# Altium PCB MainPCB.PcbDoc
Units mm, origin at the board's own origin, x right, y up, seen from the top; angles counter-clockwise.
Board outline 116 x 94 mm, 2 copper layers (Top Layer, Bottom Layer); 36 components, 102 nets, 480 pads, 170 vias.
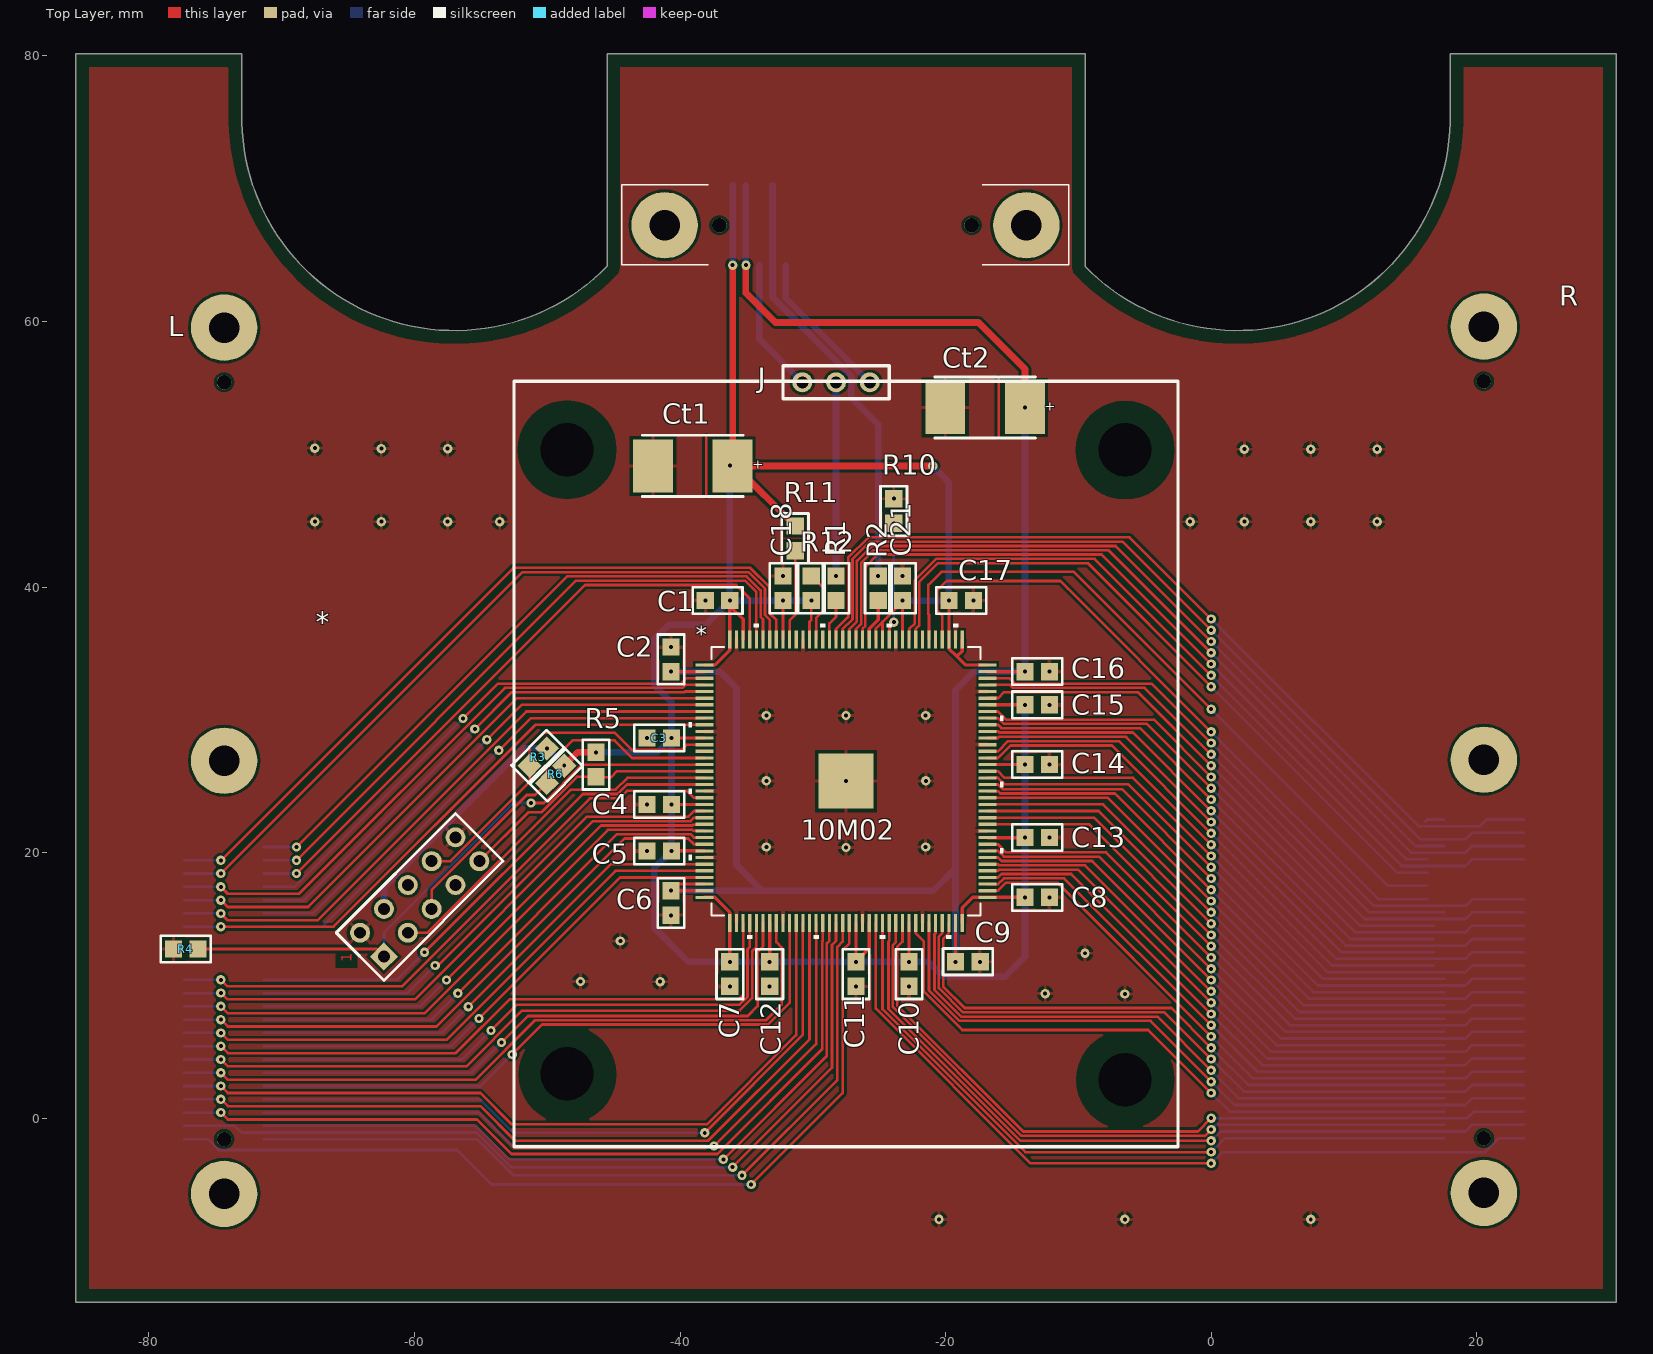
[diagram p0: Top Layer view]
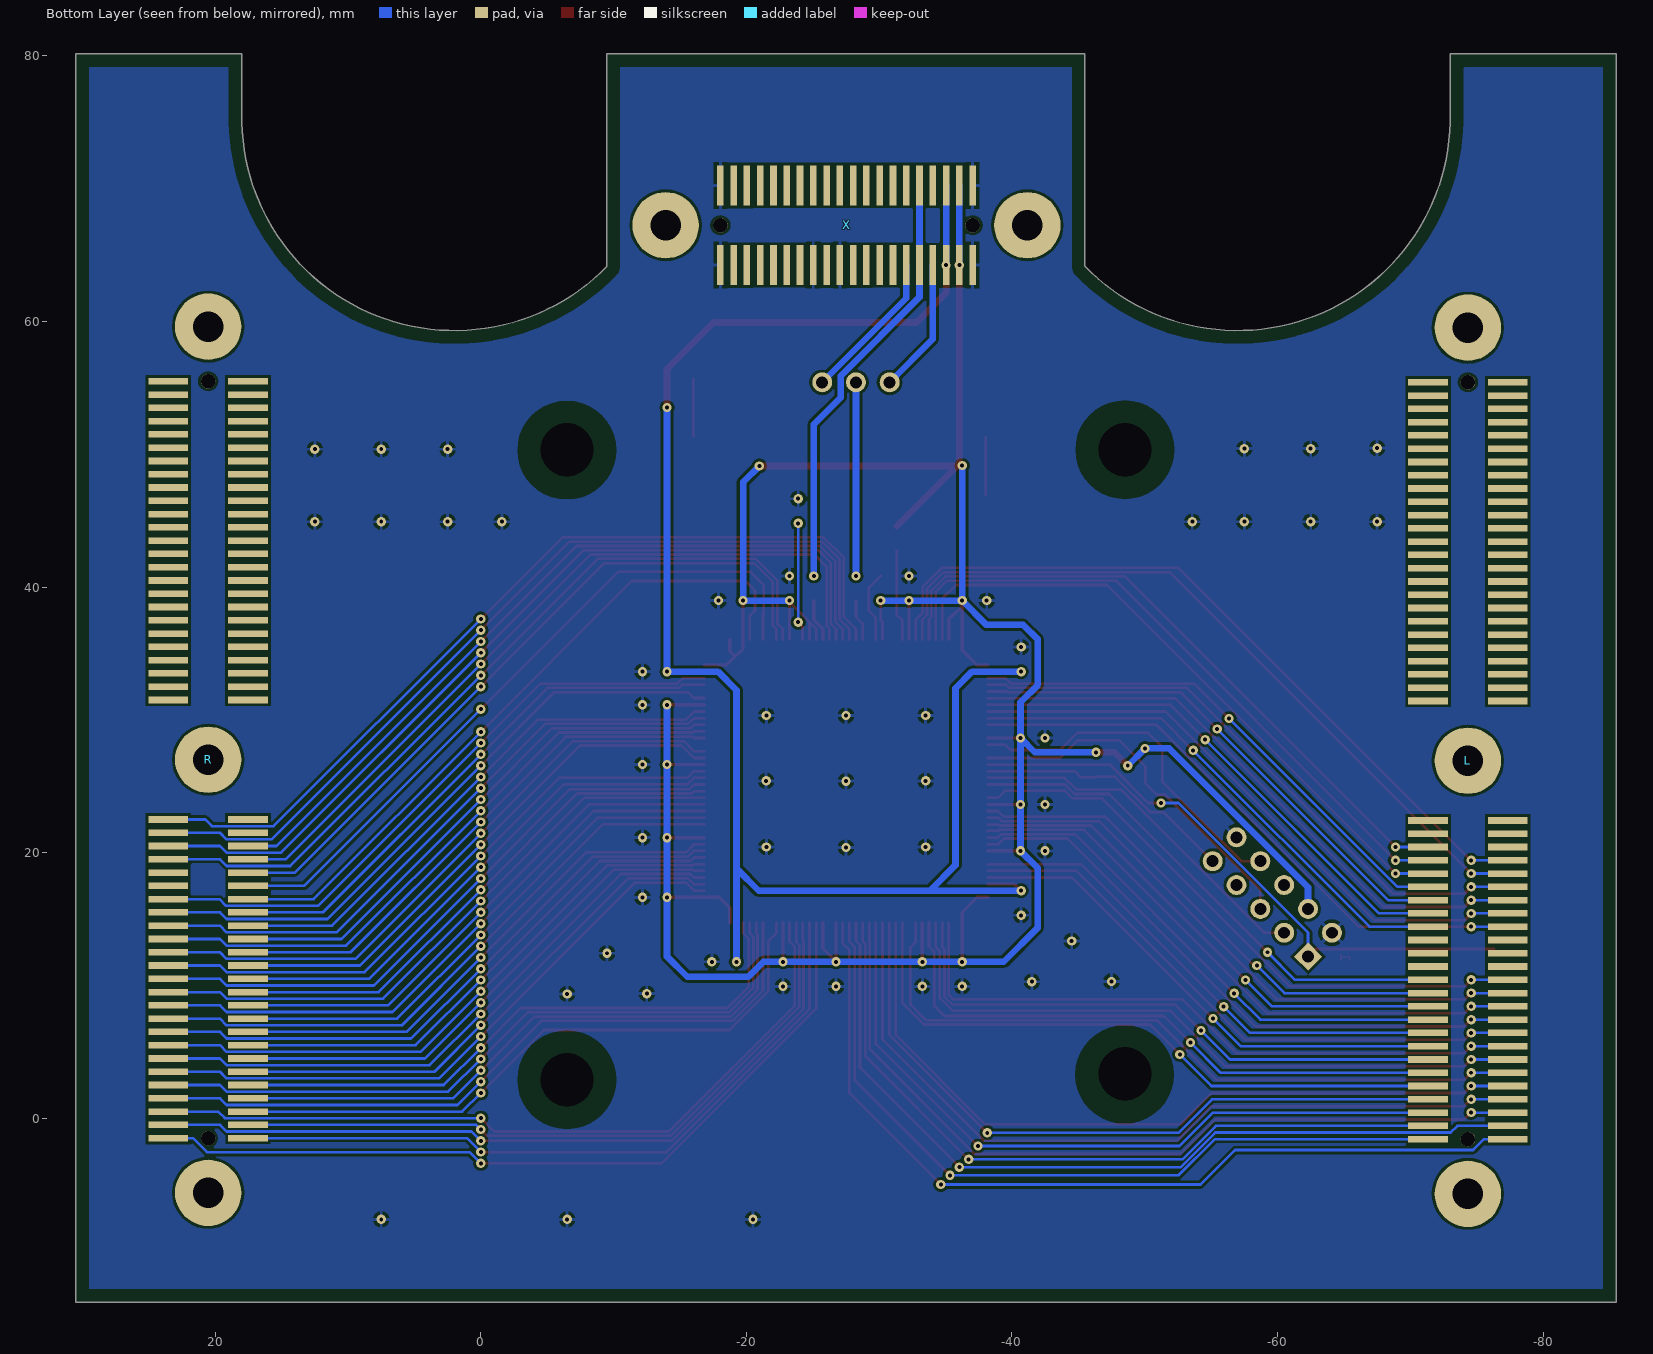
[diagram p1: Bottom Layer view, seen from below]

## Layer stack, top to bottom
Top Solder: solder mask 0.0102, Solder Resist, Dk 3.5
Top Layer: signal copper 0.0356
Dielectric 1: dielectric 0.32, FR-4, Dk 4.8
Bottom Layer: signal copper 0.0356
Bottom Solder: solder mask 0.0102, Solder Resist, Dk 3.5

## Board outline
-85.502,-13.843 -85.502,80.157 -73.003,80.157 -73,80.16 -73,75.009 ccw(c-56.975,75.347) -45.5,64.157 -45.5,80.157 -9.5,80.157 -9.5,64.157 ccw(c1.975,75.347) 18,75.009 18,80.16 18.003,80.157 30.5,80.157 30.5,-13.843

## Design rules (kind name [scope] priority, off if disabled: settings)
BoardOutlineClearance [All] p1: gap=1 ignorepadtopadclearanceinfootprint=FALSE
Clearance [All] p1: gap=0.15 ignorepadtopadclearanceinfootprint=FALSE except(0: Arc-Hole Track-Hole SMDPad-Hole THPad-Hole Via-Hole Fill-Hole Poly-Hole Region-Hole Text-Hole; 0.125: Track-Track; 0.2: Arc-Poly Track-Poly SMDPad-Poly THPad-Poly Via-Poly Fill-Poly Poly-Poly)
ComponentClearance [All] p1: gap=0.15 collisioncheckmode=3 verticalgap=-1 showdistances=FALSE
HoleSize [All] p1: absolutevalues=TRUE maxlimit=7 minlimit=0.025 maxpercent=80.000 minpercent=20.000
HoleToHoleClearance [All] p1: gap=0.2 allowstackedmicrovias=TRUE
MinimumAnnularRing [All] p1: minimumring=0.15
MinimumSolderMaskSliver [All] p1: minsoldermaskwidth=0.15
PolygonConnect [All] p1: connectstyle=Relief reliefconductorwidth=0.254 reliefentries=4 polygonreliefangle="90 Angle" airgapwidth=0.254
RoutingVias [All] p1: holewidth=0.3 width=0.7 viastyle="Through Hole" minholewidth=0.3 minwidth=0.7 maxholewidth=7 maxwidth=7
SilkToSilkClearance [All] p1 off: silktosilkclearance=0.254
SilkToSolderMaskClearance [IsPad] p1 off: minsilkscreentomaskgap=0.15 clearancetoexposedcopper=TRUE
SolderMaskExpansion [All] p1: expansion=0.05
Width [All] p1: maxlimit=2 minlimit=0.15 preferedwidth=0.254
24 further rules are at their usual default settings.

## Components (designator, comment, footprint, x,y, rotation, side; value= is the part's Value field where it differs from the comment)
10M02 "Part Number: 10M02SCE144C8G" EQFP-144_A:1P65_ -27.5,25.384 r0 top locked value=Value
* "JTAG" JTAG -59.528,16.709 r45 top locked
C1 "*" 0805 -37.175,38.984 r180 top
C2 "*" 0805 -40.689,34.559 r90 top
C3 "*" 0805 -41.564,28.634 r180 top
C4 "*" 0805 -41.564,23.634 r180 top
C5 "*" 0805 -41.564,20.134 r180 top
C6 "*" 0805 -40.689,16.209 r90 top
C7 "*" 0805 -36.25,10.859 r90 top
C8 "*" 0805 -13.1,16.634 r0 top
C9 "*" 0805 -18.325,11.784 r0 top
C10 "*" 0805 -22.75,10.859 r270 top
C11 "*" 0805 -26.75,10.859 r270 top
C12 "*" 0805 -33.25,10.859 r270 top
C13 "*" 0805 -13.1,21.134 r180 top
C14 "*" 0805 -13.1,26.634 r180 top
C15 "*" 0805 -13.1,31.134 r0 top
C16 "*" 0805 -13.1,33.634 r0 top
C17 "*" 0805 -18.825,38.984 r0 top
C18 "*" 0805 -32.25,39.909 r90 top
C21 "*" 0805 -23.25,39.909 r90 top
Ct1 "C_Ta" C_Ta -39.039,49.125 r180 top
Ct2 "C_Ta" C_Ta -17.025,53.525 r180 top
J "JUMPER_SWITCH_2S" JUMPER_SWITCH_2S -28.25,55.424 r0 top locked
L "FSI-150-L" FSI-150 -74.276,26.945 r0 top locked
R "FSI-150-R" FSI-150 20.599,27.02 r0 top locked
R1 "*" 0805 -28.25,39.909 r90 top
R2 "*" 0805 -25.075,39.909 r90 top
R3 "10K" 0805 -50.674,27.197 r45 top
R4 "1K" 0805 -77.228,12.743 r0 top
R5 "10K" 0805 -46.328,26.634 r90 top
R6 "10K" 0805 -49.374,25.897 r45 top
R10 "10K" 0805 -23.902,45.73 r270 top
R11 "10K" 0805 -31.328,43.668 r90 top
R12 "10K" 0805 -30.11,39.909 r270 top
X "FSI120" FSI-120 -26.872,67.436 r0 top locked

## Footprints (in the part's own frame and the unit in brackets; to place one, negate y for a bottom-side part, rotate by r counter-clockwise, add the part's x,y. Pads: shape width x height; smd on the part's side, far side on the other; paste and mask are expansions set on the pad)
0805 [mm]
  rect 1.3x1.3 smd: 1(-0.925,0) 2(0.925,0)
  silkscreen extent -1.88,-1 1.88,1, body extent -1,-0.63 1,0.63, height 0.4
C_Ta [mm]
  rect 3x4 smd: 1(-3,0) 2(3,0)
  Top Layer lines w0.2: -1.016,2.159 -1.016,-2.159
  silkscreen extent -3.8,-2.3 3.8,2.3, body extent -3.8,-2.3 3.8,2.3, height 4.3
EQFP-144_A:1P65_ [mm]
  rect 1.353x0.239 smd paste+0 mask+0: 1(-10.672,8.75) 2(-10.672,8.25) 3(-10.672,7.75) 4(-10.672,7.25) 5(-10.672,6.75) 6(-10.672,6.25) 7(-10.672,5.75) 8(-10.672,5.25) 9(-10.672,4.75) 10(-10.672,4.25) 11(-10.672,3.75) 12(-10.672,3.25) 13(-10.672,2.75) 14(-10.672,2.25) 15(-10.672,1.75) 16(-10.672,1.25) 17(-10.672,0.75) 18(-10.672,0.25) 19(-10.672,-0.25) 20(-10.672,-0.75) 21(-10.672,-1.25) 22(-10.672,-1.75) 23(-10.672,-2.25) 24(-10.672,-2.75) 25(-10.672,-3.25) 26(-10.672,-3.75) 27(-10.672,-4.25) 28(-10.672,-4.75) 29(-10.672,-5.25) 30(-10.672,-5.75) 31(-10.672,-6.25) 32(-10.672,-6.75) 33(-10.672,-7.25) 34(-10.672,-7.75) 35(-10.672,-8.25) 36(-10.672,-8.75) 73(10.672,-8.75) 74(10.672,-8.25) 75(10.672,-7.75) 76(10.672,-7.25) 77(10.672,-6.75) 78(10.672,-6.25) 79(10.672,-5.75) 80(10.672,-5.25) 81(10.672,-4.75) 82(10.672,-4.25) 83(10.672,-3.75) 84(10.672,-3.25) 85(10.672,-2.75) 86(10.672,-2.25) 87(10.672,-1.75) 88(10.672,-1.25) 89(10.672,-0.75) 90(10.672,-0.25) 91(10.672,0.25) 92(10.672,0.75) 93(10.672,1.25) 94(10.672,1.75) 95(10.672,2.25) 96(10.672,2.75) 97(10.672,3.25) 98(10.672,3.75) 99(10.672,4.25) 100(10.672,4.75) 101(10.672,5.25) 102(10.672,5.75) 103(10.672,6.25) 104(10.672,6.75) 105(10.672,7.25) 106(10.672,7.75) 107(10.672,8.25) 108(10.672,8.75)
  rect 0.239x1.353 smd paste+0 mask+0: 37(-8.75,-10.672) 38(-8.25,-10.672) 39(-7.75,-10.672) 40(-7.25,-10.672) 41(-6.75,-10.672) 42(-6.25,-10.672) 43(-5.75,-10.672) 44(-5.25,-10.672) 45(-4.75,-10.672) 46(-4.25,-10.672) 47(-3.75,-10.672) 48(-3.25,-10.672) 49(-2.75,-10.672) 50(-2.25,-10.672) 51(-1.75,-10.672) 52(-1.25,-10.672) 53(-0.75,-10.672) 54(-0.25,-10.672) 55(0.25,-10.672) 56(0.75,-10.672) 57(1.25,-10.672) 58(1.75,-10.672) 59(2.25,-10.672) 60(2.75,-10.672) 61(3.25,-10.672) 62(3.75,-10.672) 63(4.25,-10.672) 64(4.75,-10.672) 65(5.25,-10.672) 66(5.75,-10.672) 67(6.25,-10.672) 68(6.75,-10.672) 69(7.25,-10.672) 70(7.75,-10.672) 71(8.25,-10.672) 72(8.75,-10.672) 109(8.75,10.672) 110(8.25,10.672) 111(7.75,10.672) 112(7.25,10.672) 113(6.75,10.672) 114(6.25,10.672) 115(5.75,10.672) 116(5.25,10.672) 117(4.75,10.672) 118(4.25,10.672) 119(3.75,10.672) 120(3.25,10.672) 121(2.75,10.672) 122(2.25,10.672) 123(1.75,10.672) 124(1.25,10.672) 125(0.75,10.672) 126(0.25,10.672) 127(-0.25,10.672) 128(-0.75,10.672) 129(-1.25,10.672) 130(-1.75,10.672) 131(-2.25,10.672) 132(-2.75,10.672) 133(-3.25,10.672) 134(-3.75,10.672) 135(-4.25,10.672) 136(-4.75,10.672) 137(-5.25,10.672) 138(-5.75,10.672) 139(-6.25,10.672) 140(-6.75,10.672) 141(-7.25,10.672) 142(-7.75,10.672) 143(-8.25,10.672) 144(-8.75,10.672)
  rect 4.14x4.14 smd paste-2.057 mask+0: EPAD(0,0)
  silkscreen extent -11.86,-11.86 11.86,11.86, body extent 0,0 0.25,0.25, height 0.25
FSI-120 [mm]
  rect 0.5x3 smd far side: 1(8.833,-3.186) 2(7.833,-3.186) 3(6.833,-3.186) 4(5.833,-3.186) 5(4.833,-3.186) 6(3.833,-3.186) 7(2.833,-3.186) 8(1.833,-3.186) 9(0.833,-3.186) 10(-0.167,-3.186) 11(-1.167,-3.186) 12(-2.167,-3.186) 13(-3.167,-3.186) 14(-4.167,-3.186) 15(-5.167,-3.186) 16(-6.167,-3.186) 17(-7.167,-3.186) 18(-8.167,-3.186) 19(-9.167,-3.186) 20(-10.167,-3.186) 21(-10.167,2.814) 22(-9.167,2.814) 23(-8.167,2.814) 24(-7.167,2.814) 25(-6.167,2.814) 26(-5.167,2.814) 27(-4.167,2.814) 28(-3.167,2.814) 29(-2.167,2.814) 30(-1.167,2.814) 31(-0.167,2.814) 32(0.833,2.814) 33(1.833,2.814) 34(2.833,2.814) 35(3.833,2.814) 36(4.833,2.814) 37(5.833,2.814) 38(6.833,2.814) 39(7.833,2.814) 40(8.833,2.814)
  round 1.1 hole 1.1 unplated: H1(-10.167,-0.186) H2(8.833,-0.186)
  round 5 hole 2.3: UL_HOLE(12.953,-0.186) UR_HOLE(-14.287,-0.186)
  body extent -17.72,-5.19 16.38,4.81, height 8.25
FSI-150 [mm]
  round 1.1 hole 1.1 unplated: 1(-0.063,-28.521) 1(-0.063,28.479)
  rect 3x0.5 smd far side: R_1(-3.063,-28.52) R_2(2.937,-28.52) R_3(-3.063,-27.52) R_4(2.937,-27.52) R_5(-3.063,-26.52) R_6(2.937,-26.52) R_7(-3.063,-25.52) R_8(2.937,-25.52) R_9(-3.063,-24.52) R_10(2.937,-24.52) R_11(-3.063,-23.52) R_12(2.937,-23.52) R_13(-3.063,-22.52) R_14(2.937,-22.52) R_15(-3.063,-21.52) R_16(2.937,-21.52) R_17(-3.063,-20.52) R_18(2.937,-20.52) R_19(-3.063,-19.52) R_20(2.937,-19.52) R_21(-3.063,-18.52) R_22(2.937,-18.52) R_23(-3.063,-17.52) R_24(2.937,-17.52) R_25(-3.063,-16.52) R_26(2.937,-16.52) R_27(-3.063,-15.52) R_28(2.937,-15.52) R_29(-3.063,-14.52) R_30(2.937,-14.52) R_31(-3.063,-13.52) R_32(2.937,-13.52) R_33(-3.063,-12.52) R_34(2.937,-12.52) R_35(-3.063,-11.52) R_36(2.937,-11.52) R_37(-3.063,-10.52) R_38(2.937,-10.52) R_39(-3.063,-9.52) R_40(2.937,-9.52) R_41(-3.063,-8.52) R_42(2.937,-8.52) R_43(-3.063,-7.52) R_44(2.937,-7.52) R_45(-3.063,-6.52) R_46(2.937,-6.52) R_47(-3.063,-5.52) R_48(2.937,-5.52) R_49(-3.063,-4.52) R_50(2.937,-4.52) R_51(-3.063,4.479) R_52(2.937,4.479) R_53(-3.063,5.479) R_54(2.937,5.479) R_55(-3.063,6.479) R_56(2.937,6.479) R_57(-3.063,7.479) R_58(2.937,7.479) R_59(-3.063,8.479) R_60(2.937,8.479) R_61(-3.063,9.479) R_62(2.937,9.479) R_63(-3.063,10.479) R_64(2.937,10.479) R_65(-3.063,11.479) R_66(2.937,11.479) R_67(-3.063,12.479) R_68(2.937,12.479) R_69(-3.063,13.479) R_70(2.937,13.479) R_71(-3.063,14.479) R_72(2.937,14.479) R_73(-3.063,15.479) R_74(2.937,15.479) R_75(-3.063,16.479) R_76(2.937,16.479) R_77(-3.063,17.479) R_78(2.937,17.479) R_79(-3.063,18.479) R_80(2.937,18.479) R_81(-3.063,19.479) R_82(2.937,19.479) R_83(-3.063,20.479) R_84(2.937,20.479) R_85(-3.063,21.479) R_86(2.937,21.479) R_87(-3.063,22.479) R_88(2.937,22.479) R_89(-3.063,23.479) R_90(2.937,23.479) R_91(-3.063,24.479) R_92(2.937,24.479) R_93(-3.063,25.479) R_94(2.937,25.479) R_95(-3.063,26.479) R_96(2.937,26.479) R_97(-3.063,27.479) R_98(2.937,27.479) R_99(-3.063,28.479) R_100(2.937,28.479)
  round 5 hole 2.3: RB_HOLE(-0.063,-32.641) RM_HOLE(-0.063,-0.021) RU_HOLE(-0.063,32.599)
  body extent -5.14,-36.05 4.86,36.05, height 8.25
JTAG [mm]
  rect 1.5x1.5 hole 0.9: 1(-5.166,-1.248)
  round 1.5 hole 0.9: 2(-5.166,1.292) 3(-2.626,-1.248) 4(-2.626,1.292) 5(-0.086,-1.248) 6(-0.086,1.292) 7(2.454,-1.248) 8(2.454,1.292) 9(4.994,-1.248) 10(4.994,1.292)
  silkscreen extent -6.44,-2.52 6.26,2.56, body extent -10.3,-4.4 10.3,4.4, height 9.1
JUMPER_SWITCH_2S [mm] "2 state jumper switch"
  round 1.5 hole 0.9: 0(0,0) 1(-2.54,0) 2(2.54,0)
  silkscreen extent -4,-1.25 4,1.25

## Part data
10M02: library part 10M02SCE144C8G, "No Description Available", Built_By=EMA_Cory, Copyright="Copyright (C) 2018 Accelerated Designs. All rights reserved", Manufacturer_Part_Number=10M02SCE144C8G, RefDes=RefDes, Type=DEV, Vendor=Intel
C1 C2 C3 C4 C5 C6 C7 C8 C9 C10 C11 C12 C13 C14 C15 C16 C17 C18 C21: library part C0805, "0805 ceramic capacitor"
Ct1 Ct2: "tantalum capacitor"
J: "2 state jumper switch"
L: "fsi 150 left"
R: "fsi 150 right"
R1 R2 R3 R4 R5 R6 R10 R11 R12: library part R0805, "0805 resistor"

## Free pads (board coordinates)
  round 7 on Keep-Out: 10(-48.477,3.289) 11(-48.502,50.346) 12(-6.477,50.314) 13(-6.477,2.896)
  round 0 hole 4 unplated: Hole(-48.502,3.346) Hole(-48.502,50.346) Hole(-6.502,2.896) Hole(-6.502,50.346)

## Via types
v1: diameter 0.7, hole 0.3, Top Layer to Bottom Layer, tented both sides, 134 vias
v2: diameter 0.7, hole 0.3, Top Layer to Bottom Layer, 36 vias

## Nets (pads, with @x,y where several pads share a name; then routed paths per layer and width w, separated by ;. In a path a pad name is that pad's centre, name@x,y a point inside that pad or via, vN(x,y) a via of type N, cw(c..) or ccw(c..) an arc to the next point about the centre after c; other vN are vias at no path point)
3: 10M02.3 L.R_40 | length 39.7
  Top Layer w0.2: v1(-56.35,30.107) -53.723,32.734 -39.935,32.734 -39.535,33.134 10M02.3
  Bottom Layer w0.2: L.R_40 -69.032,17.425 v1(-56.35,30.107)
4: 10M02.4 L.R_39 | length 45.9
  Top Layer w0.2: v2(-74.58,17.425) -74.062,16.907 -68.701,16.907 -53.199,32.409 -39.801,32.409 -39.576,32.634 10M02.4
  Bottom Layer w0.2: L.R_39 v2(-74.58,17.425)
5: 10M02.5 L.R_38 | length 39.6
  Top Layer w0.2: v1(-55.45,29.307) -52.673,32.084 -39.666,32.084 -39.616,32.134 10M02.5
  Bottom Layer w0.2: L.R_38 -68.332,16.425 -55.55,29.207 v1@-55.45,29.207
6: 10M02.6 L.R_37 | length 45.9
  Top Layer w0.2: v2(-74.58,16.425) -74.062,15.907 -68.001,15.907 -52.274,31.634 10M02.6
  Bottom Layer w0.2: L.R_37 v2(-74.58,16.425)
7: 10M02.7 L.R_36 | length 39.7
  Top Layer w0.2: v1(-54.55,28.507) -51.923,31.134 10M02.7
  Bottom Layer w0.2: L.R_36 -67.632,15.425 v1(-54.55,28.507)
8: 10M02.8 L.R_35 | length 45.9
  Top Layer w0.2: v2(-74.58,15.425) -74.062,14.907 -67.301,14.907 -51.574,30.634 10M02.8
  Bottom Layer w0.2: L.R_35 v2(-74.58,15.425)
9: 10M02.9 L.R_34 | length 39.7
  Top Layer w0.2: v1(-53.65,27.707) -51.223,30.134 10M02.9
  Bottom Layer w0.2: L.R_34 -66.932,14.425 v1(-53.65,27.707)
10: 10M02.10 L.R_33 | length 45.5
  Top Layer w0.2: v2(-74.58,14.425) -66.083,14.425 -50.874,29.634 10M02.10
  Bottom Layer w0.2: L.R_33 v2(-74.58,14.425)
19: 10M02.19 L.R_26 | length 39.3
  Top Layer w0.2: v2(-59.239,12.5) -47.321,24.418 -44.71,24.418 -43.994,25.134 10M02.19
  Bottom Layer w0.2: L.R_26 -61.314,10.425 v2(-59.239,12.5)
21: 10M02.21 L.R_25 | length 45.7
  Top Layer w0.2: v2(-74.58,10.425) -74.089,9.934 -60.957,9.934 -46.798,24.093 -44.551,24.093 -43.988,24.655 -39.47,24.655 -38.948,24.134 10M02.21
  Bottom Layer w0.2: L.R_25 v2(-74.58,10.425)
23: 10M02.23 L.R_24 | length 38.8
  Top Layer w0.2: v2(-58.439,11.505) -58.219,11.505 -47.027,22.696 -39.386,22.696 -38.948,23.134 10M02.23
  Bottom Layer w0.2: L.R_24 -60.519,9.425 v2(-58.439,11.505)
24: 10M02.24 L.R_23 | length 45
  Top Layer w0.2: v2(-74.58,9.425) -74.565,9.425 -74.113,8.973 -59.939,8.973 -46.541,22.371 -39.211,22.371 -38.948,22.634 10M02.24
  Bottom Layer w0.2: L.R_23 v2(-74.58,9.425)
25: 10M02.25 L.R_22 | length 38.8
  Top Layer w0.2: v2(-57.59,10.405) -45.949,22.046 -43.88,22.046 -39.076,22.046 -39.008,22.114 -38.191,22.114 10M02.25
  Bottom Layer w0.2: L.R_22 -59.57,8.425 v2(-57.59,10.405)
26: 10M02.26 L.R_21 | length 45.1
  Top Layer w0.2: v2(-74.58,8.425) -74.06,7.905 -59.242,7.905 -45.425,21.721 -42.122,21.721 -39.076,21.721 -39.008,21.653 -38.191,21.653 10M02.26
  Bottom Layer w0.2: L.R_21 v2(-74.58,8.425)
27: 10M02.27 L.R_20 | length 39.1
  Top Layer w0.2: v2(-56.739,9.405) -44.748,21.396 -40.639,21.396 -39.211,21.396 -38.948,21.134 10M02.27
  Bottom Layer w0.2: L.R_20 -58.719,7.425 v2(-56.739,9.405)
28: 10M02.28 L.R_19 | length 45.4
  Top Layer w0.2: v2(-74.58,7.425) -74.06,6.905 -58.344,6.905 -44.177,21.071 -39.386,21.071 -38.948,20.634 10M02.28
  Bottom Layer w0.2: L.R_19 v2(-74.58,7.425)
31: 10M02.31 L.R_18 | length 38.4
  Top Layer w0.2: v2(-55.939,8.405) -45.21,19.134 10M02.31
  Bottom Layer w0.2: L.R_18 -57.919,6.425 v2(-55.939,8.405)
32: 10M02.32 L.R_17 | length 44.7
  Top Layer w0.2: v2(-74.58,6.425) -74.06,5.905 -57.59,5.905 -44.861,18.634 10M02.32
  Bottom Layer w0.2: L.R_17 v2(-74.58,6.425)
33: 10M02.33 L.R_16 | length 38.4
  Top Layer w0.2: v2(-55.139,7.505) -44.51,18.134 10M02.33
  Bottom Layer w0.2: L.R_16 -57.219,5.425 v2(-55.139,7.505)
39: 10M02.39 L.R_15 | length 49.5
  Top Layer w0.2: v2(-74.58,5.425) -74.06,4.905 -56.89,4.905 -52.822,8.973 -35.557,8.973 -35.25,9.28 10M02.39
  Bottom Layer w0.2: L.R_15 v2(-74.58,5.425)
40: 10M02.40 L.R_14 | length 44
  Top Layer w0.2: v2(-54.239,6.605) -52.288,8.555 -35.515,8.555 -34.925,9.145 -34.925,12.717 -34.75,12.892 10M02.40
  Bottom Layer w0.2: L.R_14 -56.419,4.425 v2(-54.239,6.605)
41: 10M02.41 L.R_13 | length 50.9
  Top Layer w0.2: v2(-74.58,4.425) -74.06,3.905 -56.09,3.905 -51.89,8.105 -35.506,8.105 -34.572,9.039 -34.572,12.575 -34.25,12.897 10M02.41
  Bottom Layer w0.2: L.R_13 v2(-74.58,4.425)
42: 10M02.42 L.R_12 | length 45.7
  Top Layer w0.2: v1(-53.439,5.705) -51.439,7.705 -34.901,7.705 -34.15,8.455 -34.15,12.537 -33.75,12.937 10M02.42
  Bottom Layer w0.2: L.R_12 -55.719,3.425 v1(-53.439,5.705)
44: 10M02.44 L.R_11 | length 53.9
  Top Layer w0.2: v2(-74.58,3.425) -74.051,2.896 -55.397,2.896 -50.913,7.38 -33.526,7.38 -32.35,8.555 -32.35,12.855 -32.75,13.255 10M02.44
  Bottom Layer w0.2: L.R_11 v2(-74.58,3.425)
46: 10M02.46 L.R_10 | length 48.2
  Top Layer w0.2: v1(-52.639,4.805) -50.389,7.055 -33.391,7.055 -31.75,8.696 10M02.46
  Bottom Layer w0.2: L.R_10 -55.019,2.425 v1(-52.639,4.805)
47: 10M02.47 L.R_9 | length 58.5
  Top Layer w0.2: v2(-74.58,2.425) -74.06,1.905 -55.039,1.905 -52.673,-0.461 -37.967,-0.461 -31.25,6.255 10M02.47
  Bottom Layer w0.2: L.R_9 v2(-74.58,2.425)
48: 10M02.48 L.R_8 | length 53.1
  Top Layer w0.2: v1(-38.139,-1.095) -30.75,6.294 10M02.48
  Bottom Layer w0.2: L.R_8 -55.059,1.425 -52.539,-1.095 v1(-38.139,-1.095)
49: 10M02.49 L.R_7 | length 60.3
  Top Layer w0.2: v2(-74.58,1.425) -74.06,0.905 -55.039,0.905 -52.439,-1.695 -37.888,-1.695 -30.25,5.942 10M02.49
  Bottom Layer w0.2: L.R_7 v2(-74.58,1.425)
50: 10M02.50 L.R_6 | length 54.9
  Top Layer w0.2: v1(-37.439,-2.095) -29.75,5.594 10M02.50
  Bottom Layer w0.2: L.R_6 -55.139,0.425 -52.619,-2.095 v1(-37.439,-2.095)
51: 10M02.51 L.R_5 | length 62.1
  Top Layer w0.2: v2(-74.58,0.425) -74.06,-0.095 -55.289,-0.095 -52.689,-2.695 -37.19,-2.695 -29.3,5.195 -29.3,13.295 -29.25,13.345 10M02.51
  Bottom Layer w0.2: L.R_5 v2(-74.58,0.425)
52: 10M02.52 L.R_4 | length 56.8
  Top Layer w0.2: v1(-36.739,-3.095) -28.95,4.694 -28.95,13.15 -28.75,13.35 10M02.52
  Bottom Layer w0.2: L.R_4 -55.359,-0.575 -52.838,-3.095 v1(-36.739,-3.095)
53: 10M02.53 L.R_3 | length 64.2
  Top Layer w0.2: v1(-36.039,-3.684) -28.55,3.805 -28.55,13.055 -28.25,13.355 10M02.53
  Bottom Layer w0.2: L.R_3 -73.539,-0.575 -73.039,-1.075 -55.318,-1.075 -52.698,-3.695 -36.05,-3.695 v1(-36.039,-3.684)
54: 10M02.54 L.R_2 | length 59.3
  Top Layer w0.2: v1(-35.339,-4.295) -28.15,2.894 -28.15,12.894 -27.75,13.294 10M02.54
  Bottom Layer w0.2: L.R_2 -55.278,-1.575 -52.558,-4.295 v1(-35.339,-4.295)
55: 10M02.55 L.R_1 | length 66.9
  Top Layer w0.2: v1(-34.639,-4.995) -27.75,1.894 -27.75,12.655 -27.25,13.155 10M02.55
  Bottom Layer w0.2: L.R_1 -75.559,-1.575 -74.739,-2.395 -56.807,-2.395 -54.207,-4.995 v1(-34.639,-4.995)
59: 10M02.59 R.R_2 | length 60.9
  Top Layer w0.2: 10M02.59 -25.25,8.259 -13.591,-3.4 v1(0,-3.4)
  Bottom Layer w0.2: v1(0,-3.4) 0.85,-2.55 20.618,-2.55 21.668,-1.5 R.R_2
60: 10M02.60 R.R_1 | length 53.7
  Top Layer w0.2: 10M02.60 -24.75,8.218 -13.982,-2.55 v1(0,-2.55)
  Bottom Layer w0.2: v1(0,-2.55) 1.05,-1.5 R.R_1
61: 10M02.61 R.R_4 | length 59
  Top Layer w0.2: 10M02.61 -24.25,13.355 -24.3,13.305 -24.3,8.228 -14.372,-1.7 v1(0,-1.7)
  Bottom Layer w0.2: v1(0,-1.7) 0.7,-1 19.14,-1 19.64,-0.5 R.R_4
62: 10M02.62 R.R_3 | length 52.3
  Top Layer w0.2: 10M02.62 -23.75,13.255 -23.975,13.03 -23.975,8.363 -14.287,-1.325 -0.475,-1.325 v1(0,-0.85)
  Bottom Layer w0.2: v1(0,-0.85) 0.35,-0.5 R.R_3
63: 10M02.63 R.R_6 | length 58.1
  Top Layer w0.2: 10M02.63 -23.25,13.295 -23.65,12.895 -23.65,8.497 -14.153,-1 -1,-1 v1(0,0)
  Bottom Layer w0.2: v1(0,0) 19.284,0 19.784,0.5 R.R_6
65: 10M02.65 R.R_5 | length 48.3
  Top Layer w0.2: 10M02.65 -22.25,13.935 -21.639,13.324 -21.639,9.547 -18.738,6.646 -4.74,6.646 v1(0,1.905)
  Bottom Layer w0.2: v1(0,1.905) 1.405,0.5 R.R_5
67: 10M02.67 R.R_8 | length 53.7
  Top Layer w0.2: 10M02.67 -21.25,9.617 -18.962,7.33 -4.575,7.33 v1(0,2.755)
  Bottom Layer w0.2: v1(0,2.755) 1.755,1 19.14,1 19.64,1.5 R.R_8
68: 10M02.68 R.R_7 | length 46.8
  Top Layer w0.2: 10M02.68 -20.75,13.935 -20.837,13.848 -20.837,9.934 -20.838,9.664 -18.828,7.655 -4.05,7.655 v1(0,3.605)
  Bottom Layer w0.2: v1(0,3.605) 2.105,1.5 R.R_7
69: 10M02.69 R.R_10 | length 52.8
  Top Layer w0.2: -20.512,9.934 -20.512,13.673 -20.25,13.935 10M02.69 ; -20.513,10.205 -20.513,9.799 -18.693,7.98 -3.524,7.98 v1(0,4.455)
  Bottom Layer w0.2: v1(0,4.455) 2.455,2 19.14,2 19.64,2.5 R.R_10
70: 10M02.70 R.R_9 | length 45.8
  Top Layer w0.2: 10M02.70 -19.75,13.935 -20.188,13.498 -20.188,9.934 -18.559,8.305 -3,8.305 v1(0,5.305)
  Bottom Layer w0.2: v1(0,5.305) 2.805,2.5 R.R_9
74: 10M02.74 R.R_12 | length 46.9
  Top Layer w0.2: 10M02.74 -16.052,17.134 -15.439,17.746 -11.591,17.746 v1(0,6.155)
  Bottom Layer w0.2: v1(0,6.155) 3.155,3 19.14,3 19.64,3.5 R.R_12
75: 10M02.75 R.R_11 | length 40.6
  Top Layer w0.2: 10M02.75 -16.052,17.634 -15.614,18.071 -11.066,18.071 v1(0,7.005)
  Bottom Layer w0.2: v1(0,7.005) 3.505,3.5 R.R_11
76: 10M02.76 R.R_14 | length 46.6
  Top Layer w0.2: 10M02.76 -16.052,18.134 -15.789,18.396 -10.541,18.396 v1(0,7.855)
  Bottom Layer w0.2: v1(0,7.855) 3.855,4 19.14,4 19.64,4.5 R.R_14
77: 10M02.77 R.R_13 | length 40.3
  Top Layer w0.2: 10M02.77 -16.052,18.634 -15.964,18.721 -10.016,18.721 v1(0,8.705)
  Bottom Layer w0.2: v1(0,8.705) 4.205,4.5 R.R_13
78: 10M02.78 R.R_16 | length 46.4
  Top Layer w0.2: 10M02.78 -16.052,19.134 -15.964,19.046 -9.491,19.046 v1(0,9.555)
  Bottom Layer w0.2: v1(0,9.555) 4.555,5 19.14,5 19.64,5.5 R.R_16
79: 10M02.79 R.R_15 | length 40.2
  Top Layer w0.2: 10M02.79 -16.052,19.634 -15.789,19.371 -8.966,19.371 v1(0,10.405)
  Bottom Layer w0.2: v1(0,10.405) 4.905,5.5 R.R_15
80: 10M02.80 R.R_18 | length 46.4
  Top Layer w0.2: 10M02.80 -16.052,20.134 -15.614,19.696 -8.441,19.696 v1(0,11.255)
  Bottom Layer w0.2: v1(0,11.255) 5.255,6 19.14,6 19.64,6.5 R.R_18
81: 10M02.81 R.R_17 | length 40.2
  Top Layer w0.2: 10M02.81 -16.052,20.634 -15.439,20.021 -7.916,20.021 v1(0,12.105)
  Bottom Layer w0.2: v1(0,12.105) 5.605,6.5 R.R_17
84: 10M02.84 R.R_20 | length 46.8
  Top Layer w0.2: 10M02.84 -9.178,22.134 v1(0,12.955)
  Bottom Layer w0.2: v1(0,12.955) 5.955,7 19.14,7 19.64,7.5 R.R_20
85: 10M02.85 R.R_19 | length 40.6
  Top Layer w0.2: 10M02.85 -8.828,22.634 v1(0,13.805)
  Bottom Layer w0.2: v1(0,13.805) 6.305,7.5 R.R_19
86: 10M02.86 R.R_22 | length 46.8
  Top Layer w0.2: 10M02.86 -8.479,23.134 v1(0,14.655)
  Bottom Layer w0.2: v1(0,14.655) 6.655,8 19.14,8 19.64,8.5 R.R_22
87: 10M02.87 R.R_21 | length 40.6
  Top Layer w0.2: 10M02.87 -8.129,23.634 v1(0,15.505)
  Bottom Layer w0.2: v1(0,15.505) 7.005,8.5 R.R_21
88: 10M02.88 R.R_24 | length 46.8
  Top Layer w0.2: 10M02.88 -7.778,24.134 v1(0,16.355)
  Bottom Layer w0.2: v1(0,16.355) 7.355,9 19.14,9 19.64,9.5 R.R_24
89: 10M02.89 R.R_23 | length 40.6
  Top Layer w0.2: 10M02.89 -16.052,24.634 -15.877,24.459 -7.254,24.459 v1(0,17.205)
  Bottom Layer w0.2: v1(0,17.205) 7.705,9.5 R.R_23
90: 10M02.90 R.R_26 | length 46.8
  Top Layer w0.2: 10M02.90 -16.052,25.134 -15.702,24.784 -6.729,24.784 v1(0,18.055)
  Bottom Layer w0.2: v1(0,18.055) 8.055,10 19.14,10 19.64,10.5 R.R_26
91: 10M02.91 R.R_25 | length 40.6
  Top Layer w0.2: 10M02.91 -16.052,25.634 -15.573,25.155 -6.25,25.155 v1(0,18.905)
  Bottom Layer w0.2: v1(0,18.905) 8.405,10.5 R.R_25
92: 10M02.92 R.R_28 | length 46.8
  Top Layer w0.2: 10M02.92 -16.052,26.134 -15.552,25.634 -5.879,25.634 v1(0,19.755)
  Bottom Layer w0.2: v1(0,19.755) 8.755,11 19.14,11 19.64,11.5 R.R_28
94: 10M02.94 R.R_27 | length 40.8
  Top Layer w0.2: 10M02.94 -16.052,27.134 -15.114,28.071 -7.466,28.071 v1(0,20.605)
  Bottom Layer w0.2: v1(0,20.605) 9.105,11.5 R.R_27@16.75,11.5
95: 10M02.95 R.R_30 | length 47.7
  Top Layer w0.2: 10M02.95 -16.052,27.634 -15.289,28.396 -6.941,28.396 v1(0,21.455)
  Bottom Layer w0.2: v1(0,21.455) 9.455,12 19.14,12 19.64,12.5 R.R_30
97: 10M02.97 R.R_29 | length 40.3
  Top Layer w0.2: 10M02.97 -16.052,28.634 -15.964,28.721 -6.416,28.721 v1(0,22.305)
  Bottom Layer w0.2: v1(0,22.305) 9.805,12.5 R.R_29@16.75,12.5
98: 10M02.98 R.R_32 | length 47.3
  Top Layer w0.2: 10M02.98 -16.052,29.134 -15.964,29.046 -5.891,29.046 v1(0,23.155)
  Bottom Layer w0.2: v1(0,23.155) 10.155,13 19.14,13 19.64,13.5 R.R_32
99: 10M02.99 R.R_31 | length 40.3
  Top Layer w0.2: 10M02.99 -16.052,29.634 -15.789,29.371 -5.366,29.371 v1(0,24.005)
  Bottom Layer w0.2: v1(0,24.005) 10.505,13.5 R.R_31@16.75,13.5
100: 10M02.100 R.R_34 | length 47.3
  Top Layer w0.2: 10M02.100 -16.052,30.134 -15.614,29.696 -4.841,29.696 v1(0,24.855)
  Bottom Layer w0.2: v1(0,24.855) 10.855,14 19.14,14 19.64,14.5 R.R_34
101: 10M02.101 R.R_33 | length 40.3
  Top Layer w0.2: 10M02.101 -16.052,30.634 -15.439,30.021 -4.316,30.021 v1(0,25.705)
  Bottom Layer w0.2: v1(0,25.705) 11.205,14.5 R.R_33@16.75,14.5
103: 10M02.103 R.R_36 | length 47.8
  Top Layer w0.2: 10M02.103 -16.809,31.653 -16.032,31.653 -15.602,32.084 -5.529,32.084 v1(0,26.555)
  Bottom Layer w0.2: v1(0,26.555) 11.555,15 19.14,15 19.64,15.5 R.R_36
105: 10M02.105 R.R_35 | length 41.5
  Top Layer w0.2: 10M02.105 -15.138,32.634 -14.913,32.409 -5.003,32.409 v1(0,27.405)
  Bottom Layer w0.2: v1(0,27.405) 11.905,15.5 R.R_35
106: 10M02.106 R.R_38 | length 47.7
  Top Layer w0.2: 10M02.106 -15.179,33.134 -14.779,32.734 -4.479,32.734 v1(0,28.255)
  Bottom Layer w0.2: v1(0,28.255) 12.255,16 19.195,16 19.695,16.5 R.R_38
112: 10M02.112 R.R_37 | length 51
  Top Layer w0.2: 10M02.112 -20.25,37.83 -20.65,38.23 -20.65,39.737 -19.925,40.462 -11.357,40.462 -10.779,39.884 v1(0,29.105)
  Bottom Layer w0.2: v1(0,29.105) 12.605,16.5 R.R_37@16.286,16.5
114: 10M02.114 R.R_39 | length 51.9
  Top Layer w0.2: 10M02.114 -21.25,37.911 -21.3,37.961 -21.3,40.157 -20.308,41.149 -10.344,41.149 v1(0,30.805)
  Bottom Layer w0.2: v1(0,30.805) 13.305,17.5 R.R_39@16.286,17.5
116: 10M02.116 R.R_41 | length 53
  Top Layer w0.2: 10M02.116 -22.25,36.832 -21.988,37.094 -21.988,40.389 -20.577,41.799 -9.294,41.799 v1(0,32.505)
  Bottom Layer w0.2: v1(0,32.505) 14.005,18.5 R.R_41@16.286,18.5
117: 10M02.117 R.R_44 | length 60.9
  Top Layer w0.2: 10M02.117 -22.75,36.832 -22.313,37.269 -22.313,40.524 -20.712,42.124 -8.769,42.124 v1(0,33.355)
  Bottom Layer w0.2: v1(0,33.355) 14.355,19 19.14,19 19.64,19.5 R.R_44
123: 10M02.123 R2.1 | length 3.2
  Top Layer w0.25: 10M02.123 -25.745,36.06 -25.745,36.88 -25.075,37.55 R2.1
124: 10M02.124 R.R_43 | length 57.8
  Top Layer w0.2: 10M02.124 -26.25,36.87 -26.039,37.081 -26.039,41.523 -25.113,42.449 -8.244,42.449 v1(0,34.205)
  Bottom Layer w0.2: v1(0,34.205) 14.705,19.5 R.R_43@16.286,19.5
125: 10M02.125 R.R_46 | length 65.9
  Top Layer w0.2: 10M02.125 -26.75,36.832 -26.364,37.218 -26.364,41.83 -25.42,42.774 -7.719,42.774 v1(0,35.055)
  Bottom Layer w0.2: v1(0,35.055) 15.055,20 19.14,20 19.64,20.5 R.R_46
126: 10M02.126 R.R_45 | length 60.2
  Top Layer w0.2: 10M02.126 -27.25,36.832 -26.689,37.393 -26.689,41.964 -25.554,43.099 -7.194,43.099 v1(0,35.905)
  Bottom Layer w0.2: v1(0,35.905) 15.405,20.5 R.R_45
127: 10M02.127 R.R_48 | length 66.9
  Top Layer w0.2: 10M02.127 -27.75,36.832 -27.014,37.568 -27.014,42.099 -25.689,43.424 -6.669,43.424 v1(0,36.755)
  Bottom Layer w0.2: v1(0,36.755) 15.755,21 19.14,21 19.64,21.5 R.R_48
128: 10M02.128 R.R_50 | length 67.3
  Top Layer w0.2: 10M02.128 -28.25,36.832 -27.339,37.743 -27.339,42.234 -25.823,43.749 -6.144,43.749 v1(0,37.605)
  Bottom Layer w0.2: v1(0,37.605) 15.605,22 20.243,22 20.743,22.5 R.R_50
129: 10M02.129 R1.1 | length 3.1
  Top Layer w0.2: 10M02.129 -28.75,37.261 -28.25,37.761 R1.1
137: 10M02.137 L.R_43 | length 58
  Top Layer w0.2: v2(-74.58,19.425) -52.55,41.455 -39.561,41.455 -34.712,41.455 -33.275,40.019 -33.275,38.03 -32.75,37.505 10M02.137
  Bottom Layer w0.2: L.R_43 v2(-74.58,19.425)
138: 10M02.138 L.R_41 | length 57.6
  Top Layer w0.2: v2(-74.58,18.425) -51.875,41.13 -39.561,41.13 -34.846,41.13 -33.6,39.884 -33.6,37.895 -33.25,37.545 10M02.138
  Bottom Layer w0.2: L.R_41 v2(-74.58,18.425)
139: 10M02.139 L.R_46 | length 50.1
  Top Layer w0.2: v2(-68.88,20.425) -48.5,40.805 -34.981,40.805 -33.925,39.749 -33.925,37.761 -33.75,37.586 10M02.139
  Bottom Layer w0.2: L.R_46 v2(-68.88,20.425)
140: 10M02.140 L.R_44 | length 49.7
  Top Layer w0.2: v2(-68.88,19.425) -47.825,40.48 -35.115,40.48 -34.25,39.615 10M02.140
  Bottom Layer w0.2: L.R_44 v2(-68.88,19.425)
141: 10M02.141 L.R_42 | length 49.1
  Top Layer w0.2: v2(-68.88,18.425) -47.15,40.155 -35.768,40.155 -34.75,39.137 10M02.141
  Bottom Layer w0.2: L.R_42 v2(-68.88,18.425)
CONF_DONE: 10M02.135 R11.1 | length 6.9
  Top Layer w0.2: 10M02.135 -31.75,37.467 -31.328,37.888 R11.1
CONFIG_SEL: 10M02.120 R10.2 | length 8.9
  Top Layer w0.2: 10M02.120 -24.23,36.075 -24.23,37.028 v2(-23.902,37.357)
  Bottom Layer w0.2: v2(-23.902,37.357) v2(-23.902,44.805) v2@-23.902,44.791
GND: 10M02.11 10M02.20 10M02.30 10M02.38 10M02.45 10M02.57 10M02.66 10M02.83 10M02.96 10M02.104 10M02.110 10M02.119 10M02.133 10M02.143 10M02.EPAD *.2 *.10 C1.2 C2.2 C3.2 C4.2 C5.2 C6.1 C7.1 C8.2 C9.2 C10.2 C11.2 C12.2 C13.1 C14.1 C15.2 C16.2 C17.2 C18.2 C21.2 Ct1.2 Ct2.2 R4.1 R10.1 X.1 X.8 X.10 X.20 X.21 X.40
  other v1: -20.5,-7.616 -6.5,-7.616 7.5,-7.616 -12.5,9.384 -6.5,9.363 -36.25,9.934 -33.25,9.934 -26.75,9.934 -22.75,9.934 -41.5,10.283 -47.5,10.304 -17.4,11.784 -9.5,12.425 -44.5,13.345 -40.689,15.284 -12.175,16.634 -42.489,20.134 -27.5,20.384 -33.5,20.425 -21.5,20.425 -12.175,21.134 -42.489,23.634 -27.5,25.384 -33.5,25.405 -21.487,25.405 -12.175,26.634 -42.489,28.634 -33.5,30.323 -27.5,30.323 -21.5,30.323 -12.175,31.134 -12.175,33.634 -40.689,35.484 -38.1,38.984 -17.9,38.984 -32.25,40.834 -23.25,40.834 -67.5,44.925 -62.5,44.925 -57.5,44.925 -53.58,44.925 -1.58,44.925 2.5,44.925 7.5,44.925 12.5,44.925 2.5,50.384 7.5,50.384 12.5,50.384 -62.5,50.424 -57.5,50.424 -67.5,50.465
  other v2: -23.902,46.655
JTAGEN: 10M02.13 *.8 R3.1 | length 26.8
  Top Layer w0.2: *.8 -57.292,19.357 -51.328,25.322 R3.1 -51.328,27.943 -50.251,29.02 -44.906,29.02 -43.619,27.734 -39.885,27.734 -39.485,28.134 10M02.13
nCONFIG: 10M02.1 10M02.12 10M02.22 10M02.29 10M02.36 10M02.37 10M02.43 10M02.56 10M02.58 10M02.64 10M02.72 10M02.73 10M02.82 10M02.93 10M02.102 10M02.108 10M02.109 10M02.111 10M02.118 10M02.121 10M02.122 10M02.132 10M02.136 10M02.142 10M02.144 *.4 C1.1 C3.1 C4.1 C5.1 C7.2 C8.1 C10.1 C11.1 C12.1 C13.2 C14.2 C15.1 C17.1 C18.1 C21.1 Ct1.1 R3.2 R5.2 R6.2 R11.2 R12.2 X.19 X.22 | length 252.5
  Top Layer w0.2: 10M02.132 -30.25,37.395 -30.11,37.535 v2(-30.11,38.984) ; 10M02.122 -25.25,36.88 -24.75,37.38 ; 10M02.121 -24.75,37.38 ; -23.25,38.205 C21.1@-23.25,38.88 ; v1(-23.25,38.984) C21.1@-23.25,38.88 ; -24.75,37.38 C21.1@-23.25,38.88
  Top Layer w0.25: v1(-40.639,20.134) 10M02.29 ; v1(-40.639,23.634) 10M02.22 ; v1(-40.639,28.634) 10M02.12 ; 10M02.36 -37.384,16.634 -36.25,15.5 10M02.37 v1(-36.25,11.784) ; 10M02.1 -37.364,34.134 -36.25,35.248 10M02.144 C1.1@-36.25,38.576 ; v1(-36.25,38.984) C1.1@-36.25,38.576 ; 10M02.142 -35.25,37.576 C1.1@-36.25,38.576 ; v1(-33.25,11.784) 10M02.43 ; C18.1@-32.575,38.984 -32.413,38.821 -32.25,38.659 10M02.136 ; 10M02.56 v1(-26.75,11.784) -25.75,12.784 10M02.58 ; 10M02.118 -23.25,38.205 ; v1(-22.75,11.784) 10M02.64 ; v1(-19.75,38.984) 10M02.111 -19.75,35.37 -19.155,34.775 ; 10M02.72 -18.75,15.839 -17.955,16.634 10M02.73 v1(-14.025,16.634) ; 10M02.109 -18.755,36.05 -18.755,35.175 -19.155,34.775 ; 10M02.82 v1(-14.025,21.134) ; 10M02.93 v1(-14.025,26.634) ; 10M02.102 v1(-14.025,31.134) ; 10M02.108 -18.514,34.134 -19.155,34.775
  Top Layer w0.5: v2(-48.72,26.551) -47.712,27.559 v2(-46.328,27.559) ; Ct1.1 Ct1.1@-35.86,49.125 ; Ct1.1@-36.039,49.155 v1(-36.039,64.25) ; R11.2 Ct1.1@-35.86,49.125 ; v1(-20.975,49.125) Ct1.1@-35.86,49.125
  Bottom Layer w0.5: *.4 -62.299,17.392 -51.84,27.851 v2(-50.02,27.851) v2(-48.72,26.551) ; v2(-46.328,27.559) -41.714,27.559 v1(-40.639,28.634) ; v1(-36.25,49.155) v1(-36.25,38.984) ; v1(-36.039,64.25) X.22 ; v2(-30.11,38.984) v1(-32.25,38.984) v1(-36.25,38.984) ; v1(-23.25,38.984) v1(-19.75,38.984) -19.75,47.9 v1(-20.975,49.125) ; v1(-14.025,31.134) v1(-14.025,26.634) v1(-14.025,21.134) v1(-14.025,16.634) -14.025,12.173 -15.543,10.655 -20.15,10.655 -21.278,11.784 v1(-22.75,11.784) v1(-26.75,11.784) v1(-33.25,11.784) v1(-36.25,11.784) -39.378,11.784 -41.95,14.355 -41.95,18.823 v1(-40.639,20.134) v1(-40.639,23.634) v1(-40.639,28.634) ; v1(-40.639,28.634) -40.639,31.323 -41.95,32.634 -41.95,36.049 -40.844,37.155 -38.079,37.155 v1(-36.25,38.984)
NetJ_0: J.0 R1.2 | length 14.6
  Bottom Layer w0.5: v1(-28.25,40.834) J.0
nSTATUS: 10M02.131 R12.1 | length 5.4
  Top Layer w0.2: R12.1 -29.21,39.934 -29.21,38.23 -29.75,37.69 10M02.131
TCK: 10M02.16 *.1 R4.2 | length 45.4
  Top Layer w0.2: R4.2 -62.868,12.743 *.1 ; v2(-51.223,23.743) -50.256,23.743 -47.365,26.634 10M02.16
  Bottom Layer w0.2: *.1 -62.299,13.972 -52.528,23.743 v2(-51.223,23.743)
TDI: 10M02.17 *.9 R5.1 | length 19.8
  Top Layer w0.2: *.9 -51.429,23.043 -50.428,23.043 -47.762,25.709 R5.1 -46.29,25.67 -45.201,25.67 -44.737,26.134 10M02.17
TDO: 10M02.18 *.3 | length 27.2
  Top Layer w0.2: *.3 -59.001,13.969 -48.228,24.743 -44.844,24.743 -43.953,25.634 10M02.18
TMS: 10M02.15 *.5 R6.1 | length 27.9
  Top Layer w0.2: *.5 -58.707,17.18 -51.543,24.343 -50.928,24.343 R6.1 -50.028,26.516 -48.085,28.459 -44.937,28.459 -43.612,27.134 10M02.15
VCC3-: J.1 X.17 | length 10.2
  Bottom Layer w0.5: X.17 -34.039,58.673 J.1
VCC4: R2.2 X.16 X.25 | length 32.7
  Bottom Layer w0.5: X.25 X.16 -33.039,61.839 -27.1,55.9 -27.1,54.274 -25.075,52.249 v1(-25.075,40.834)
VCC5: J.2 X.15 | length 11.4
  Bottom Layer w0.5: X.15 -32.039,61.753 J.2
VCCA: 10M02.2 10M02.34 10M02.35 10M02.71 10M02.107 C2.1 C6.2 C9.1 C16.1 Ct2.1 X.18 X.23 | length 137.6
  Top Layer w0.25: v1(-40.689,33.634) 10M02.2 ; 10M02.35 v1(-40.689,17.134) -40.189,17.634 10M02.34 ; v1(-19.25,11.784) 10M02.71 ; 10M02.107@-16.823,33.628 10M02.107 v1(-14.025,33.634)
  Top Layer w0.5: v1(-35.039,64.25) -35.039,62.144 -32.82,59.925 -17.525,59.925 -14.025,56.425 v2(-14.025,53.525)
  Bottom Layer w0.5: v1(-40.689,17.134) -20.926,17.134 -19.289,18.77 ; v1(-40.689,33.634) -36.998,33.634 -35.75,32.385 -35.75,19.059 -33.825,17.134 ; v1(-35.039,64.25) X.23 ; v1(-19.25,11.784) -19.25,32.234 -17.85,33.634 v1(-14.025,33.634) v2(-14.025,53.525)
pads on no net: 10M02.14 10M02.113 10M02.115 10M02.130 10M02.134 *.6 *.7 L.1 L.R_27 L.R_28 L.R_29 L.R_30 L.R_31 L.R_32 L.R_45 L.R_47 L.R_48 L.R_49 L.R_50 L.R_51 L.R_52 L.R_53 L.R_54 L.R_55 L.R_56 L.R_57 L.R_58 L.R_59 L.R_60 L.R_61 L.R_62 L.R_63 L.R_64 L.R_65 L.R_66 L.R_67 L.R_68 L.R_69 L.R_70 L.R_71 L.R_72 L.R_73 L.R_74 L.R_75 L.R_76 L.R_77 L.R_78 L.R_79 L.R_80 L.R_81 L.R_82 L.R_83 L.R_84 L.R_85 L.R_86 L.R_87 L.R_88 L.R_89 L.R_90 L.R_91 L.R_92 L.R_93 L.R_94 L.R_95 L.R_96 L.R_97 L.R_98 L.R_99 L.R_100 L.RB_HOLE L.RM_HOLE L.RU_HOLE R.1 R.R_40 R.R_42 R.R_47 R.R_49 R.R_51 R.R_52 R.R_53 R.R_54 R.R_55 R.R_56 R.R_57 R.R_58 R.R_59 R.R_60 R.R_61 R.R_62 R.R_63 R.R_64 R.R_65 R.R_66 R.R_67 R.R_68 R.R_69 R.R_70 R.R_71 R.R_72 R.R_73 R.R_74 R.R_75 R.R_76 R.R_77 R.R_78 R.R_79 R.R_80 R.R_81 R.R_82 R.R_83 R.R_84 R.R_85 R.R_86 R.R_87 R.R_88 R.R_89 R.R_90 R.R_91 R.R_92 R.R_93 R.R_94 R.R_95 R.R_96 R.R_97 R.R_98 R.R_99 R.R_100 R.RB_HOLE R.RM_HOLE R.RU_HOLE X.2 X.3 X.4 X.5 X.6 X.7 X.9 X.11 X.12 X.13 X.14 X.24 X.26 X.27 X.28 X.29 X.30 X.31 X.32 X.33 X.34 X.35 X.36 X.37 X.38 X.39 X.H1 X.H2 X.UL_HOLE X.UR_HOLE
copper on no net: | length 1.5
  Bottom Layer w0.2: 16.141,22.355 16.286,22.5 17.536,22.5

## Polygon pours and split planes (outlines as drawn)
GND on Bottom Layer "Bottom Layer-GND" (solid, pour order 8): -87.4,82.484 32.6,82.484 33.3,83.184 33.3,-16.616 -89.5,-16.616 -91.1,-18.216
GND on Top Layer "Top Layer-GND" (solid, pour order 6): -87,81.984 -86.5,81.484 32,81.484 32,-17.416 30.5,-18.916 29.8,-18.216 -86.9,-18.216

## Other copper
Top Layer:
  text "1" at -64.728,11.743 h0.8 r90

## Silkscreen, mask and mechanical layers (free items; w line width, h text height)
Top Overlay:
  lines w0.1: -37.873,64.294 -44.373,64.294 -44.373,70.294 -37.873,70.294 ; -17.233,64.294 -10.733,64.294 -10.733,70.294 -17.233,70.294
  lines w0.254: -52.502,-2.154 -52.502,55.499 -2.502,55.499 -2.502,-2.154 -52.502,-2.154
Mechanical 8:
  lines w0.2: -27.5,-13.843 -27.5,33.157 -27.5,80.157
  lines w0.254: -76.341,-1.575 -74.339,-1.575 ; -76.341,55.425 -74.339,55.425 ; -74.339,-3.523 -74.339,-1.575 ; -74.339,0.477 -74.339,-1.575 ; -74.339,53.477 -74.339,55.425 ; -74.339,57.477 -74.339,55.425 ; -72.341,-1.575 -74.339,-1.575 ; -72.341,55.425 -74.339,55.425 ; -43.141,67.25 -41.139,67.25 ; -41.139,65.302 -41.139,67.25 ; -41.139,69.302 -41.139,67.25 ; -39.141,67.25 -41.139,67.25 ; -39.041,67.25 -37.039,67.25 ; -37.039,65.302 -37.039,67.25 ; -37.039,69.302 -37.039,67.25 ; -35.041,67.25 -37.039,67.25 ; -20.041,67.25 -18.039,67.25 ; -18.039,65.302 -18.039,67.25 ; -18.039,69.302 -18.039,67.25 ; -16.041,67.25 -18.039,67.25 ; -15.941,67.25 -13.939,67.25 ; -13.939,65.302 -13.939,67.25 ; -13.939,69.302 -13.939,67.25 ; -11.941,67.25 -13.939,67.25 ; 18.534,-1.5 20.536,-1.5 ; 18.534,55.5 20.536,55.5 ; 20.536,-3.448 20.536,-1.5 ; 20.536,0.552 20.536,-1.5 ; 20.536,53.552 20.536,55.5 ; 20.536,57.552 20.536,55.5 ; 22.534,-1.5 20.536,-1.5 ; 22.534,55.5 20.536,55.5
  lines w0.45: -85.5,-13.843 30.5,80.157 ; -85.5,80.157 30.5,-13.843 ; -85.218,33.157 -27.5,33.157 30.5,33.157

## Text inside footprints (layer, text, board x,y; h text height)
10M02: Top Overlay "*" at -38.825,35.784 h1.27; Mechanical 7 "0.866in/21.996mm" at -11.494,25.066 h0.64; Mechanical 7 "0.787in/19.99mm" at -46.363,25.066 h0.64; Mechanical 7 "0.787in/19.99mm" at -29.881,10.648 h0.64; Mechanical 7 "0.866in/21.996mm" at -30.04,41.389 h0.64; Mechanical 7 "0.03in/0.762mm" at -19.105,39.484 h0.64; Mechanical 7 "0.02in/0.5mm" at -13.399,33.566 h0.64; Mechanical 7 "Alt 2 Padstyle: b229_152h76" at -36.073,0.361 h1.27; Mechanical 7 "Alt 1 Padstyle: b152_229h76" at -36.073,1.885 h1.27; Mechanical 7 "Heat Tab Padstyle: r414_414" at -36.073,4.933 h1.27; Mechanical 7 "Default Vert Padstyle: r24_135" at -37.025,6.457 h1.27; Mechanical 7 "Default Horiz Padstyle: r24_135" at -37.343,7.981 h1.27; Mechanical 13 "*" at -37.431,33.749 h1.27
Ct1: Top Overlay "+" at -33.705,49.499 h0.75 r180
Ct2: Top Overlay "+" at -11.691,53.9 h0.75 r180